# Altium PCB ANT-F-2.4G-FR4.PcbDoc (part 2 of 2)
Units mil, origin at the board's own origin, x right, y up, seen from the top; angles counter-clockwise.
Board outline 8878.9 x 2863.35 mil, 2 copper layers (Top Layer, Bottom Layer); 99 components, 48 nets, 825 pads, 1430 vias.
Unrouted connection lines stored in the file: 96.
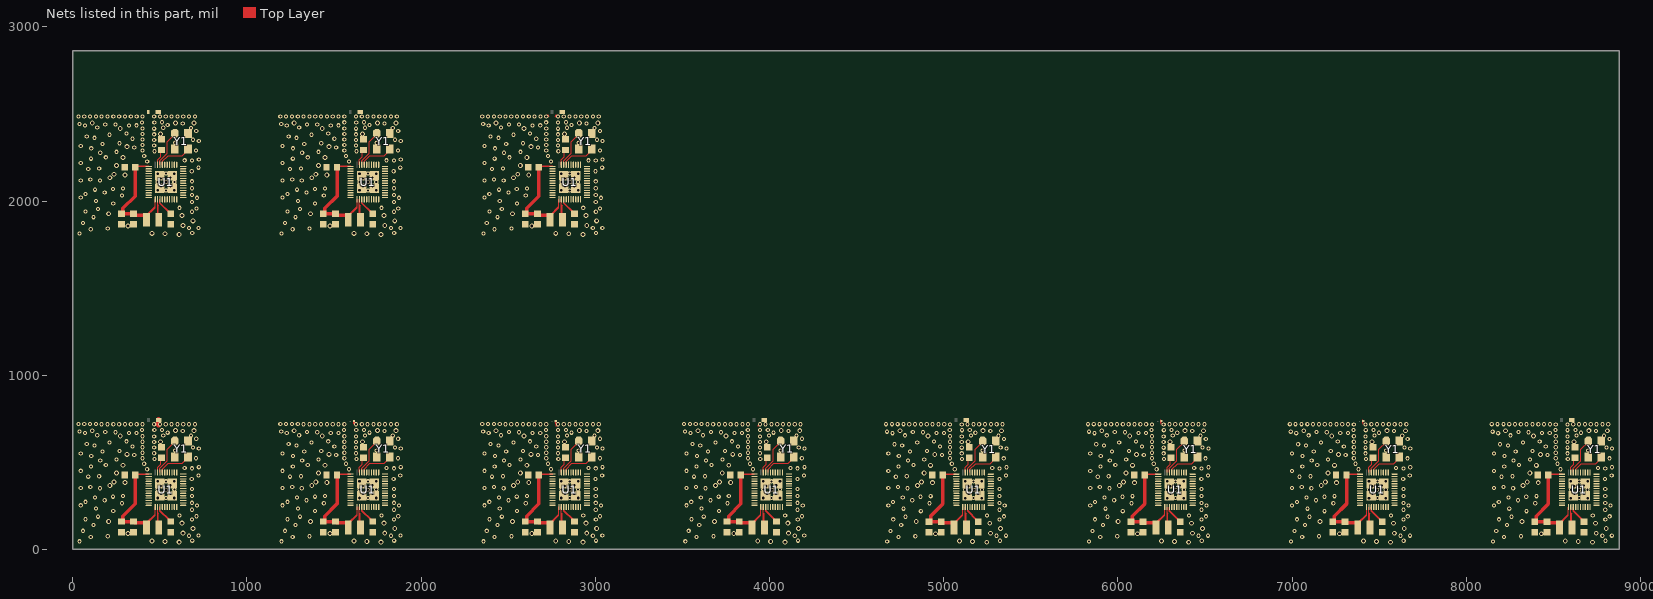
[diagram p2: the nets of this part, all layers, seen from the top]

## Via types
v1: diameter 24, hole 12, Top Layer to Bottom Layer, tented both sides, 1221 vias
v2: diameter 28, hole 16, Top Layer to Bottom Layer, tented both sides, 209 vias

## Nets (pads, with @x,y where several pads share a name; then routed paths per layer and width w, separated by ;. In a path a pad name is that pad's centre, name@x,y a point inside that pad or via, vN(x,y) a via of type N, cw(c..) or ccw(c..) an arc to the next point about the centre after c; other vN are vias at no path point) (continued)
GND: ?.0 C1.2 C2.2 C3.1 C4.1 C5.1 E1.0 E1.1@433.85,2510.87 U1.0 Y1.2 Y1.4 | length 167
  Top Layer w6: E1.0@492.39,744.57 E1.0@493.45,744.57 ; 6246.94,746.18 6246.94,727.57 cw(c6240.18,720.81) 6249.74,720.81 6249.74,719.57 ccw(c6251.57,719.57) 6250.27,718.27 ; 7406.01,746.18 7406.01,727.57 cw(c7399.25,720.81) 7408.81,720.81 7408.81,719.57 ccw(c7410.65,719.57) 7409.35,718.27
  Top Layer w8: 2727.79,2494.91 ccw(c2736.37,2494.91) 2730.29,2488.85 ; 2730.3,2488.84 2734.24,2484.91 ; 2769.24,2484.91 2772.82,2488.49 ; 2771.59,729.81 ccw(c2802.29,740.98) v1@2779.19,717.88 ; 2772.82,2488.5 ccw(c2766.4,2494.91) 2775.47,2494.91 ; E1.0@2773.12,735.98 E1.0@2773.12,738.51 ; v1@2774.66,722.6 cw(c2750.54,714.48) 2775.99,714.48 2775.99,708.57 ; v1@2777.9,725.69 v1@2778.07,725.52 ; 3935.07,708.57 v1@3935.07,714.48 ; ?.0@6249.74,738.18 cw(c6248.44,736.88) ?.0@6250.27,736.88 ; E1.0@7408.81,738.18 cw(c7407.52,736.88) E1.0@7409.35,736.88
  Top Layer w11: 1613.91,728.21 ccw(c1637.52,736.81) v1@1619.75,719.04 ; E1.0@1614.19,736.81 E1.0@1614.19,738.51 ; E1.0@2773.27,736.81 E1.0@2773.27,738.51
  Top Layer w30: v1@492.39,715.08 E1.0@492.39,744.57
  other v1: 39.65,47 1198.73,47 2357.8,47 3516.88,47 4675.95,46.67 5835.03,46.67 6994.1,46.67 8153.18,46.67 686.51,50.79 1845.58,50.79 3004.66,50.79 4163.73,50.79 5322.81,50.46 6481.88,50.46 7640.96,50.46 8800.03,50.46 103.81,72.5 1262.88,72.5 2421.96,72.5 3581.03,72.5 4740.11,72.17 5899.18,72.17 7058.26,72.17 8217.33,72.17 4837.5,76.04 5996.57,76.04 7155.65,76.04 8314.72,76.04 201.2,76.37 1360.27,76.37 2519.35,76.37 3678.42,76.37 5304.16,78.92 6463.24,78.92 7622.31,78.92 8781.39,78.92 667.86,79.25 722.44,79.84 1826.93,79.25 1881.52,79.84 2986.01,79.25 3040.59,79.84 4145.08,79.25 4199.67,79.84 5358.74,79.51 6517.82,79.51 7676.89,79.51 8835.97,79.51 4695.28,106.96 5854.35,106.96 7013.43,106.96 8172.5,106.96 58.98,107.29 1218.05,107.29 2377.13,107.29 3536.2,107.29 119.9,141.58 1278.97,141.58 2438.05,141.58 3597.12,141.58 4756.2,141.25 5915.28,141.25 7074.35,141.25 8233.43,141.25 685.14,172.86 1844.21,172.86 3003.29,172.86 4162.36,172.86 5321.44,172.53 6480.51,172.53 7639.59,172.53 8798.66,172.53 74.44,173.64 1233.51,173.64 2392.59,173.64 3551.66,173.64 4710.74,173.31 5869.81,173.31 7028.89,173.31 8187.96,173.31 145.55,188.59 1304.62,188.59 2463.7,188.59 3622.77,188.59 4781.85,188.26 5940.92,188.26 7100,188.26 8259.07,188.26 709.95,190.84 1869.03,190.84 3028.1,190.84 4187.18,190.84 5346.25,190.51 6505.33,190.51 7664.4,190.51 8823.48,190.51 5249.4,194.99 6408.48,194.99 7567.55,194.99 8726.63,194.99 613.1,195.32 1772.18,195.32 2931.25,195.32 4090.33,195.32 4868.94,219.94 6028.01,219.94 7187.09,219.94 8346.16,219.94 232.64,220.27 1391.71,220.27 2550.79,220.27 3709.86,220.27 684.68,228.42 1843.76,228.42 3002.84,228.42 4161.91,228.42 5320.99,228.09 6480.06,228.09 7639.14,228.09 8798.21,228.09 133.52,234.65 1292.59,234.65 2451.67,234.65 3610.74,234.65 4769.82,234.32 5928.89,234.32 7087.97,234.32 8247.04,234.32 714.14,252.68 1873.22,252.68 3032.29,252.68 4191.37,252.68 5350.44,252.35 6509.52,252.35 7668.6,252.35 8827.67,252.35 46.21,253.66 1205.29,253.66 2364.36,253.66 3523.44,253.66 4682.51,253.33 5841.59,253.33 7000.66,253.33 8159.74,253.33 282.57,265.67 1441.65,265.67 2600.72,265.67 3759.8,265.67 4918.87,265.34 6077.95,265.34 7237.02,265.34 8396.1,265.34 684.68,268.05 1843.76,268.05 3002.84,268.05 4161.91,268.05 5320.99,267.72 6480.06,267.72 7639.14,267.72 8798.21,267.72 73.71,273.8 1232.78,273.8 2391.86,273.8 3550.93,273.8 4710.01,273.47 5869.08,273.47 7028.16,273.47 8187.23,273.47 183.67,283.03 1342.75,283.03 2501.82,283.03 3660.9,283.03 4819.97,282.7 5979.05,282.7 7138.12,282.7 8297.2,282.7 535.46,295.41 1694.53,295.41 2853.61,295.41 4012.68,295.41 5171.76,295.08 6330.83,295.08 7489.91,295.08 8648.98,295.08 4764.99,298.98 5924.06,298.98 7083.14,298.98 8242.22,298.98 128.69,299.31 1287.76,299.31 2446.84,299.31 3605.91,299.31 4867.65,302.84 6026.73,302.84 7185.8,302.84 8344.88,302.84 231.35,303.17 1390.42,303.17 2549.5,303.17 3708.58,303.17 289.38,306.53 1448.46,306.53 2607.53,306.53 3766.61,306.53 4925.68,306.2 6084.76,306.2 7243.83,306.2 8402.91,306.2 684.68,307.69 1843.76,307.69 3002.84,307.69 4161.91,307.69 5320.99,307.36 6480.06,307.36 7639.14,307.36 8798.21,307.36 507.8,318.04 1666.87,318.04 2825.95,318.04 3985.02,318.04 5144.1,317.71 6303.17,317.71 7462.25,317.71 8621.32,317.71 561.47,318.98 1720.54,318.98 2879.62,318.98 4038.69,318.98 5197.77,318.64 6356.84,318.64 7515.92,318.64 8674.99,318.64 487.46,343.41 583.46,343.41 1646.53,343.41 1742.53,343.41 2805.61,343.41 2901.61,343.41 3964.68,343.41 4060.68,343.41 5123.76,343.08 5219.76,343.08 6282.83,343.08 6378.83,343.08 7441.91,343.08 7537.91,343.08 8600.98,343.08 8696.98,343.08 5320.99,346.99 6480.06,346.99 7639.14,346.99 8798.21,346.99 684.68,347.32 1843.76,347.32 3002.84,347.32 4161.91,347.32 156.18,351.87 1315.26,351.87 2474.33,351.87 3633.41,351.87 4792.48,351.54 5951.56,351.54 7110.63,351.54 8269.71,351.54 46.21,352.69 1205.29,352.69 2364.36,352.69 3523.44,352.69 4682.51,352.36 5841.59,352.36 7000.66,352.36 8159.74,352.36 101.2,358.69 1260.27,358.69 2419.35,358.69 3578.42,358.69 4737.5,358.36 5896.57,358.36 7055.65,358.36 8214.72,358.36 506.8,363.47 1665.88,363.47 2824.95,363.47 3984.03,363.47 5143.1,363.14 6302.18,363.14 7461.25,363.14 8620.33,363.14 561.99,368.8 1721.07,368.8 2880.14,368.8 4039.22,368.8 5198.29,368.47 6357.37,368.47 7516.44,368.47 8675.52,368.47 535.46,391.41 1694.53,391.41 2853.61,391.41 4012.68,391.41 5171.76,391.08 6330.83,391.08 7489.91,391.08 8648.98,391.08 5320.06,405 6479.14,405 7638.22,405 8797.29,405 683.76,405.34 1842.84,405.34 3001.91,405.34 4160.99,405.34 4725.43,417.74 5884.5,417.74 7043.58,417.74 8202.65,417.74 89.13,418.07 1248.2,418.07 2407.28,418.07 3566.35,418.07 152.11,420.75 1311.18,420.75 2470.26,420.75 3629.33,420.75 4788.41,420.42 5947.48,420.42 7106.56,420.42 8265.63,420.42 721.6,425.76 1880.68,425.76 3039.75,425.76 4198.83,425.76 5357.9,425.42 6516.98,425.42 7676.05,425.42 8835.13,425.42 46.21,451.72 1205.29,451.72 2364.36,451.72 3523.44,451.72 4682.51,451.39 5841.59,451.39 7000.66,451.39 8159.74,451.39 427.67,460.93 1586.74,460.93 2745.82,460.93 3904.89,460.93 5063.97,460.6 6223.04,460.6 7382.12,460.6 8541.19,460.6 5320.99,465.9 6480.06,465.9 7639.14,465.9 8798.21,465.9 684.68,466.23 1843.76,466.23 3002.84,466.23 4161.91,466.23 642.85,468.06 1801.93,468.06 2961,468.06 4120.08,468.06 5279.16,467.73 6438.23,467.73 7597.31,467.73 8756.38,467.73 724.21,472.61 1883.28,472.61 3042.36,472.61 4201.43,472.61 5360.51,472.28 6519.58,472.28 7678.66,472.28 8837.73,472.28 104.59,477.45 1263.66,477.45 2422.74,477.45 3581.81,477.45 4740.89,477.12 5899.96,477.12 7059.04,477.12 8218.11,477.12 4826.57,484.76 5985.64,484.76 7144.72,484.76 8303.79,484.76 190.26,485.09 1349.34,485.09 2508.42,485.09 3667.49,485.09 410.58,492.5 1569.66,492.5 2728.73,492.5 3887.81,492.5 5046.88,492.17 6205.96,492.17 7365.03,492.17 8524.11,492.17 158.49,511.57 1317.56,511.57 2476.64,511.57 3635.71,511.57 4794.79,511.24 5953.86,511.24 7112.94,511.24 8272.01,511.24 252.43,516.74 1411.51,516.74 2570.58,516.74 3729.66,516.74 4888.73,516.41 6047.81,516.41 7206.88,516.41 8365.96,516.41 5106.11,519.95 6265.18,519.95 7424.26,519.95 8583.33,519.95 469.81,520.29 1628.88,520.29 2787.96,520.29 3947.03,520.29 400.26,524.06 708.64,523.8 1559.33,524.06 1867.71,523.8 2718.41,524.06 3026.79,523.8 3877.48,524.06 4185.86,523.8 5036.56,523.73 5344.94,523.46 6195.63,523.73 6504.01,523.46 7354.71,523.73 7663.09,523.46 8513.78,523.73 8822.16,523.46 106.34,536.83 1265.42,536.83 2424.49,536.83 3583.57,536.83 4742.64,536.5 5901.72,536.5 7060.8,536.5 8219.87,536.5 4989.99,541.91 6149.06,541.91 7308.14,541.91 8467.21,541.91 353.69,542.25 1512.76,542.25 2671.84,542.25 3830.91,542.25 46.21,550.75 1205.29,550.75 2364.36,550.75 3523.44,550.75 4682.51,550.42 5841.59,550.42 7000.66,550.42 8159.74,550.42 467.81,552.61 1626.88,552.61 2785.96,552.61 3945.03,552.61 5104.11,552.27 6263.18,552.27 7422.26,552.27 8581.33,552.27 400.26,555.63 1559.33,555.63 2718.41,555.63 3877.48,555.63 5036.56,555.29 6195.63,555.29 7354.71,555.29 8513.78,555.29 4806.8,562.01 5965.87,562.01 7124.95,562.01 8284.02,562.01 170.5,562.34 1329.57,562.34 2488.65,562.34 3647.72,562.34 4904.19,565.88 6063.26,565.88 7222.34,565.88 8381.42,565.88 267.89,566.21 1426.96,566.21 2586.04,566.21 3745.11,566.21 5222.99,568.01 6382.06,568.01 7541.14,568.01 8700.21,568.01 586.69,568.34 1745.76,568.34 2904.84,568.34 4063.91,568.34 5360.51,579.02 6519.58,579.02 7678.66,579.02 8837.73,579.02 724.21,579.35 1883.28,579.35 3042.36,579.35 4201.43,579.35 467.81,584.92 1626.88,584.92 2785.96,584.92 3945.03,584.92 5104.11,584.59 6263.18,584.59 7422.26,584.59 8581.33,584.59 691.13,585.95 1850.21,585.95 3009.28,585.95 4168.36,585.95 5327.43,585.62 6486.51,585.62 7645.58,585.62 8804.66,585.62 5036.56,586.86 6195.63,586.86 7354.71,586.86 8513.78,586.86 400.26,587.19 1559.33,587.19 2718.41,587.19 3877.48,587.19 342.86,591.71 1501.94,591.71 2661.02,591.71 3820.09,591.71 4979.17,591.38 6138.24,591.38 7297.32,591.38 8456.39,591.38 4761.97,596.79 5921.04,596.79 7080.12,596.79 8239.19,596.79 125.67,597.12 1284.74,597.12 2443.82,597.12 3602.89,597.12 80.84,604.85 1239.91,604.85 2398.99,604.85 3558.06,604.85 4717.14,604.52 5876.21,604.52 7035.29,604.52 8194.36,604.52 212.24,614.9 1371.31,614.9 2530.39,614.9 3689.46,614.9 4848.54,614.57 6007.61,614.57 7166.69,614.57 8325.76,614.57 5104.11,616.91 6263.18,616.91 7422.26,616.91 8581.33,616.91 467.81,617.24 1626.88,617.24 2785.96,617.24 3945.03,617.24 400.26,618.75 1559.33,618.75 2718.41,618.75 3877.48,618.75 5036.56,618.42 6195.63,618.42 7354.71,618.42 8513.78,618.42 4944.38,620.75 6103.46,620.75 7262.53,620.75 8421.61,620.75 308.08,621.09 1467.16,621.09 2626.23,621.09 3785.31,621.09 709.59,635.64 1868.66,635.64 3027.74,635.64 4186.81,635.64 5345.89,635.31 6504.96,635.31 7664.04,635.31 8823.12,635.31 467.81,649.56 1626.88,649.56 2785.96,649.56 3945.03,649.56 5036.56,649.99 5104.11,649.23 6195.63,649.99 6263.18,649.23 7354.71,649.99 7422.26,649.23 8513.78,649.99 8581.33,649.23 400.26,650.32 1559.33,650.32 2718.41,650.32 3877.48,650.32 678.32,653.44 1837.4,653.44 2996.47,653.44 4155.55,653.44 5314.62,653.1 6473.7,653.1 7632.78,653.1 8791.85,653.1 519.87,654.77 1678.95,654.77 2838.02,654.77 3997.1,654.77 5156.17,654.44 6315.25,654.44 7474.32,654.44 8633.4,654.44 141.13,655.87 1300.2,655.87 2459.28,655.87 3618.35,655.87 4777.43,655.54 5936.5,655.54 7095.58,655.54 8254.65,655.54 4706.32,667.9 4958.71,668.01 5865.39,667.9 6117.79,668.01 7024.47,667.9 7276.86,668.01 8183.54,667.9 8435.94,668.01 70.02,668.23 322.41,668.34 366.05,669.01 1229.09,668.23 1481.49,668.34 1525.13,669.01 2388.17,668.23 2640.56,668.34 2684.2,669.01 3547.24,668.23 3799.64,668.34 3843.28,669.01 5002.35,668.68 6161.43,668.68 7320.5,668.68 8479.58,668.68 545.45,670.63 1704.53,670.63 2863.6,670.63 4022.68,670.63 5181.75,670.3 6340.83,670.3 7499.9,670.3 8658.98,670.3 4881.21,672.94 6040.28,672.94 7199.36,672.94 8358.43,672.94 244.91,673.28 1403.98,673.28 2563.06,673.28 3722.13,673.28 186.73,674.42 1345.8,674.42 2504.88,674.42 3663.96,674.42 4823.03,674.09 5982.11,674.09 7141.18,674.09 8300.26,674.09 38.32,676.74 1197.4,676.74 2356.48,676.74 3515.55,676.74 4674.63,676.41 5833.7,676.41 6992.78,676.41 8151.85,676.41 5267.98,679.92 6427.05,679.92 7586.13,679.92 8745.2,679.92 631.67,680.25 1790.75,680.25 2949.82,680.25 4108.9,680.25 5105,685 6264.08,685 7423.15,685 8582.23,685 398.51,686 468.7,685.33 1557.59,686 1627.78,685.33 2716.66,686 2786.85,685.33 3875.74,686 3945.93,685.33 5034.81,685.67 6193.89,685.67 7352.96,685.67 8512.04,685.67 513.37,686.67 1672.45,686.67 2831.52,686.67 3990.6,686.67 5149.67,686.34 6308.75,686.34 7467.82,686.34 8626.9,686.34 400.26,718.88 467.81,718.88 1559.33,718.88 1626.88,718.88 2718.41,718.88 2785.96,718.88 3877.48,718.88 3945.03,718.88 4802.61,719.01 4836.11,719.01 4869.61,719.01 4903.12,719.01 4936.62,719.01 4970.12,719.01 5003.62,719.01 5036.56,718.55 5104.11,718.55 5137.04,719.01 5170.54,719.01 5204.04,719.01 5237.55,719.01 5271.05,719.01 5304.55,719.01 5338.05,719.01 5961.69,719.01 5995.19,719.01 6028.69,719.01 6062.19,719.01 6095.69,719.01 6129.2,719.01 6162.7,719.01 6195.63,718.55 6263.18,718.55 6296.12,719.01 6329.62,719.01 6363.12,719.01 6396.62,719.01 6430.12,719.01 6463.63,719.01 6497.13,719.01 7120.76,719.01 7154.26,719.01 7187.76,719.01 7221.27,719.01 7254.77,719.01 7288.27,719.01 7321.77,719.01 7354.71,718.55 7422.26,718.55 7455.19,719.01 7488.69,719.01 7522.19,719.01 7555.7,719.01 7589.2,719.01 7622.7,719.01 7656.2,719.01 8279.84,719.01 8313.34,719.01 8346.84,719.01 8380.34,719.01 8413.84,719.01 8447.35,719.01 8480.85,719.01 8513.78,718.55 8581.33,718.55 8614.27,719.01 8647.77,719.01 8681.27,719.01 8714.77,719.01 8748.27,719.01 8781.78,719.01 8815.28,719.01 32.87,719.8 66.37,719.8 99.87,719.8 133.38,719.8 166.31,719.34 199.81,719.34 233.31,719.34 266.82,719.34 300.32,719.34 333.82,719.34 367.32,719.34 500.74,719.34 534.24,719.34 567.74,719.34 601.25,719.34 634.75,719.34 668.25,719.34 701.75,719.34 1191.94,719.8 1225.45,719.8 1258.95,719.8 1292.45,719.8 1325.38,719.34 1358.89,719.34 1392.39,719.34 1425.89,719.34 1459.39,719.34 1492.9,719.34 1526.4,719.34 1659.81,719.34 1693.32,719.34 1726.82,719.34 1760.32,719.34 1793.82,719.34 1827.33,719.34 1860.83,719.34 2351.02,719.8 2384.52,719.8 2418.02,719.8 2451.53,719.8 2484.46,719.34 2517.96,719.34 2551.46,719.34 2584.97,719.34 2618.47,719.34 2651.97,719.34 2685.47,719.34 2818.89,719.34 2852.39,719.34 2885.89,719.34 2919.4,719.34 2952.9,719.34 2986.4,719.34 3019.9,719.34 3510.09,719.8 3543.6,719.8 3577.1,719.8 3610.6,719.8 3643.53,719.34 3677.04,719.34 3710.54,719.34 3744.04,719.34 3777.54,719.34 3811.05,719.34 3844.55,719.34 3977.96,719.34 4011.47,719.34 4044.97,719.34 4078.47,719.34 4111.97,719.34 4145.48,719.34 4178.98,719.34 4669.17,719.47 4702.67,719.47 4736.17,719.47 4769.68,719.47 5828.24,719.47 5861.75,719.47 5895.25,719.47 5928.75,719.47 6987.32,719.47 7020.82,719.47 7054.32,719.47 7087.83,719.47 8146.4,719.47 8179.9,719.47 8213.4,719.47 8246.9,719.47 39.65,1813.3 1198.73,1813.3 2357.8,1813.3 686.51,1817.09 1845.58,1817.09 3004.66,1817.09 103.81,1838.81 1262.88,1838.81 2421.96,1838.81 201.2,1842.67 1360.27,1842.67 2519.35,1842.67 667.86,1845.56 1826.93,1845.56 2986.01,1845.56 722.44,1846.14 1881.52,1846.14 3040.59,1846.14 58.98,1873.59 1218.05,1873.59 2377.13,1873.59 119.9,1907.89 1278.97,1907.89 2438.05,1907.89 74.44,1939.94 685.14,1939.16 1233.51,1939.94 1844.21,1939.16 2392.59,1939.94 3003.29,1939.16 145.55,1954.89 1304.62,1954.89 2463.7,1954.89 709.95,1957.14 1869.03,1957.14 3028.1,1957.14 613.1,1961.62 1772.18,1961.62 2931.25,1961.62 232.64,1986.58 1391.71,1986.58 2550.79,1986.58 684.68,1994.72 1843.76,1994.72 3002.84,1994.72 133.52,2000.95 1292.59,2000.95 2451.67,2000.95 714.14,2018.98 1873.22,2018.98 3032.29,2018.98 46.21,2019.97 1205.29,2019.97 2364.36,2019.97 282.57,2031.97 1441.65,2031.97 2600.72,2031.97 684.68,2034.36 1843.76,2034.36 3002.84,2034.36 73.71,2040.11 1232.78,2040.11 2391.86,2040.11 183.67,2049.34 1342.75,2049.34 2501.82,2049.34 535.46,2061.71 1694.53,2061.71 2853.61,2061.71 128.69,2065.61 1287.76,2065.61 2446.84,2065.61 231.35,2069.48 1390.42,2069.48 2549.5,2069.48 289.38,2072.83 1448.46,2072.83 2607.53,2072.83 684.68,2073.99 1843.76,2073.99 3002.84,2073.99 507.8,2084.34 1666.87,2084.34 2825.95,2084.34 561.47,2085.28 1720.54,2085.28 2879.62,2085.28 487.46,2109.71 583.46,2109.71 1646.53,2109.71 1742.53,2109.71 2805.61,2109.71 2901.61,2109.71 684.68,2113.63 1843.76,2113.63 3002.84,2113.63 46.21,2119 156.18,2118.17 1205.29,2119 1315.26,2118.17 2364.36,2119 2474.33,2118.17 101.2,2124.99 1260.27,2124.99 2419.35,2124.99 506.8,2129.77 1665.88,2129.77 2824.95,2129.77 561.99,2135.11 1721.07,2135.11 2880.14,2135.11 535.46,2157.71 1694.53,2157.71 2853.61,2157.71 683.76,2171.64 1842.84,2171.64 3001.91,2171.64 89.13,2184.38 1248.2,2184.38 2407.28,2184.38 152.11,2187.06 1311.18,2187.06 2470.26,2187.06 721.6,2192.06 1880.68,2192.06 3039.75,2192.06 46.21,2218.02 1205.29,2218.02 2364.36,2218.02 427.67,2227.24 1586.74,2227.24 2745.82,2227.24 684.68,2232.53 1843.76,2232.53 3002.84,2232.53 642.85,2234.36 1801.93,2234.36 2961,2234.36 724.21,2238.92 1883.28,2238.92 3042.36,2238.92 104.59,2243.76 1263.66,2243.76 2422.74,2243.76 190.26,2251.39 1349.34,2251.39 2508.42,2251.39 410.58,2258.8 1569.66,2258.8 2728.73,2258.8 158.49,2277.87 1317.56,2277.87 2476.64,2277.87 252.43,2283.04 1411.51,2283.04 2570.58,2283.04 469.81,2286.59 1628.88,2286.59 2787.96,2286.59 400.26,2290.37 708.64,2290.1 1559.33,2290.37 1867.71,2290.1 2718.41,2290.37 3026.79,2290.1 106.34,2303.14 1265.42,2303.14 2424.49,2303.14 353.69,2308.55 1512.76,2308.55 2671.84,2308.55 46.21,2317.05 1205.29,2317.05 2364.36,2317.05 467.81,2318.91 1626.88,2318.91 2785.96,2318.91 400.26,2321.93 1559.33,2321.93 2718.41,2321.93 170.5,2328.65 1329.57,2328.65 2488.65,2328.65 267.89,2332.51 1426.96,2332.51 2586.04,2332.51 586.69,2334.65 1745.76,2334.65 2904.84,2334.65 724.21,2345.65 1883.28,2345.65 3042.36,2345.65 467.81,2351.23 1626.88,2351.23 2785.96,2351.23 691.13,2352.25 1850.21,2352.25 3009.28,2352.25 400.26,2353.49 1559.33,2353.49 2718.41,2353.49 342.86,2358.02 1501.94,2358.02 2661.02,2358.02 125.67,2363.43 1284.74,2363.43 2443.82,2363.43 80.84,2371.16 1239.91,2371.16 2398.99,2371.16 212.24,2381.21 1371.31,2381.21 2530.39,2381.21 467.81,2383.55 1626.88,2383.55 2785.96,2383.55 400.26,2385.06 1559.33,2385.06 2718.41,2385.06 308.08,2387.39 1467.16,2387.39 2626.23,2387.39 709.59,2401.95 1868.66,2401.95 3027.74,2401.95 467.81,2415.87 1626.88,2415.87 2785.96,2415.87 400.26,2416.62 1559.33,2416.62 2718.41,2416.62 678.32,2419.74 1837.4,2419.74 2996.47,2419.74 519.87,2421.07 1678.95,2421.07 2838.02,2421.07 141.13,2422.17 1300.2,2422.17 2459.28,2422.17 70.02,2434.54 322.41,2434.64 1229.09,2434.54 1481.49,2434.64 2388.17,2434.54 2640.56,2434.64 366.05,2435.31 1525.13,2435.31 2684.2,2435.31 545.45,2436.93 1704.53,2436.93 2863.6,2436.93 244.91,2439.58 1403.98,2439.58 2563.06,2439.58 186.73,2440.72 1345.8,2440.72 2504.88,2440.72 38.32,2443.04 1197.4,2443.04 2356.48,2443.04 631.67,2446.56 1790.75,2446.56 2949.82,2446.56 468.7,2451.63 1627.78,2451.63 2786.85,2451.63 398.51,2452.3 513.37,2452.97 1559.27,2452.42 1672.45,2452.97 2718.35,2452.42 2831.52,2452.97 166.31,2485.65 199.81,2485.65 233.31,2485.65 266.82,2485.65 300.32,2485.65 333.82,2485.65 367.32,2485.65 400.26,2485.19 467.81,2485.19 500.74,2485.65 534.24,2485.65 567.74,2485.65 601.25,2485.65 634.75,2485.65 668.25,2485.65 701.75,2485.65 1325.38,2485.65 1358.89,2485.65 1392.39,2485.65 1425.89,2485.65 1459.39,2485.65 1492.9,2485.65 1526.4,2485.65 1559.33,2485.19 1626.88,2485.19 1659.81,2485.65 1693.32,2485.65 1726.82,2485.65 1760.32,2485.65 1793.82,2485.65 1827.33,2485.65 1860.83,2485.65 2484.46,2485.65 2517.96,2485.65 2551.46,2485.65 2584.97,2485.65 2618.47,2485.65 2651.97,2485.65 2685.47,2485.65 2718.41,2485.19 2785.96,2485.19 2818.89,2485.65 2852.39,2485.65 2885.89,2485.65 2919.4,2485.65 2952.9,2485.65 2986.4,2485.65 3019.9,2485.65 32.87,2486.11 66.37,2486.11 99.87,2486.11 133.38,2486.11 1191.94,2486.11 1225.45,2486.11 1258.95,2486.11 1292.45,2486.11 2351.02,2486.11 2384.52,2486.11 2418.02,2486.11 2451.53,2486.11
  other v2: 5247.54,41.92 6406.62,41.92 7565.69,41.92 8724.77,41.92 611.24,42.25 1770.32,42.25 2929.39,42.25 4088.47,42.25 5166,45.83 6325.07,45.83 7484.15,45.83 8643.22,45.83 529.7,46.16 1688.77,46.16 2847.85,46.16 4006.92,46.16 455.33,48.77 1614.41,48.77 2773.48,48.77 3932.56,48.77 5091.63,48.44 6250.71,48.44 7409.78,48.44 8568.86,48.44 4953.99,90.84 6113.06,90.84 7272.14,90.84 8431.21,90.84 317.69,91.17 1476.76,91.17 2635.84,91.17 3794.91,91.17 632.77,93.78 1791.84,93.78 2950.92,93.78 4109.99,93.78 5269.07,93.45 6428.14,93.45 7587.22,93.45 8746.3,93.45 690.05,120.66 1849.12,120.66 3008.2,120.66 4167.27,120.66 5326.35,120.33 6485.42,120.33 7644.5,120.33 8803.57,120.33 5264.5,150.86 6423.58,150.86 7582.65,150.86 8741.73,150.86 628.2,151.19 1787.28,151.19 2946.35,151.19 4105.43,151.19 206.6,161.44 1365.68,161.44 2524.75,161.44 3683.83,161.44 4842.9,161.11 6001.98,161.11 7161.05,161.11 8320.13,161.11 4849.46,367.77 6008.54,367.77 7167.61,367.77 8326.69,367.77 213.16,368.1 1372.24,368.1 2531.31,368.1 3690.39,368.1 4936.37,383.75 6095.45,383.75 7254.52,383.75 8413.6,383.75 300.07,384.08 1459.15,384.08 2618.22,384.08 3777.3,384.08 4873.06,387.91 6032.13,387.91 7191.21,387.91 8350.28,387.91 236.76,388.24 1395.83,388.24 2554.91,388.24 3713.98,388.24 251.8,438.87 1410.87,438.87 2569.95,438.87 3729.02,438.87 4888.1,438.54 6047.18,438.54 7206.25,438.54 8365.33,438.54 289.02,483.52 1448.1,483.52 2607.17,483.52 3766.25,483.52 4925.32,483.19 6084.4,483.19 7243.47,483.19 8402.55,483.19 312.32,546.43 1471.4,546.43 2630.47,546.43 3789.55,546.43 4948.62,546.1 6107.7,546.1 7266.77,546.1 8425.85,546.1 504.56,618.49 1663.63,618.49 2822.71,618.49 3981.78,618.49 5140.86,618.16 6299.93,618.16 7459.01,618.16 8618.08,618.16 4909.6,650.94 6068.67,650.94 7227.75,650.94 8386.82,650.94 273.29,651.27 1432.37,651.27 2591.44,651.27 3750.52,651.27 4748.83,681.81 5332.94,681.93 5907.91,681.81 6492.02,681.93 7066.98,681.81 7651.09,681.93 8226.06,681.81 8810.17,681.93 112.53,682.14 590.37,682.66 696.64,682.26 1271.61,682.14 1749.44,682.66 1855.72,682.26 2430.68,682.14 2908.52,682.66 3014.79,682.26 3589.76,682.14 4067.59,682.66 4173.87,682.26 5226.67,682.33 6385.74,682.33 7544.82,682.33 8703.9,682.33 611.24,1808.55 1770.32,1808.55 2929.39,1808.55 529.7,1812.47 1688.77,1812.47 2847.85,1812.47 455.33,1815.08 1614.41,1815.08 2773.48,1815.08 317.69,1857.48 1476.76,1857.48 2635.84,1857.48 632.77,1860.09 1791.84,1860.09 2950.92,1860.09 690.05,1886.96 1849.12,1886.96 3008.2,1886.96 628.2,1917.49 1787.28,1917.49 2946.35,1917.49 206.6,1927.74 1365.68,1927.74 2524.75,1927.74 213.16,2134.41 1372.24,2134.41 2531.31,2134.41 300.07,2150.38 1459.15,2150.38 2618.22,2150.38 236.76,2154.55 1395.83,2154.55 2554.91,2154.55 251.8,2205.18 1410.87,2205.18 2569.95,2205.18 289.02,2249.83 1448.1,2249.83 2607.17,2249.83 312.32,2312.73 1471.4,2312.73 2630.47,2312.73 504.56,2384.8 1663.63,2384.8 2822.71,2384.8 273.29,2417.58 1432.37,2417.58 2591.44,2417.58 112.53,2448.45 590.37,2448.96 696.64,2448.56 1271.61,2448.45 1749.44,2448.96 1855.72,2448.56 2430.68,2448.45 2908.52,2448.96 3014.79,2448.56
PA0: U1.39
PA1: U1.40
PA2: U1.41
PA3: U1.42
PA4: U1.36
PA5: U1.37
PA6: U1.38
PA7: U1.4
PA8: U1.5
PA9: U1.6
PA10: U1.48
PA11: U1.47
PA12: U1.46
PA13: U1.45
PA14: U1.44
PA15: U1.43
PB0: U1.24
PB1: U1.23
PB2: U1.22
PB3: U1.21
PB4: U1.20
PB5: U1.19
PB6: U1.18
PB7: U1.17
PB8: U1.8
PB9: U1.7
PB10: U1.16
PB11: U1.15
PB12: U1.14
PB13: U1.13
PB14: U1.12
PB15: U1.11
PB16: U1.10
PB17: U1.9
PB18: U1.30
PB19: U1.29
PB20: U1.28
PB21: U1.27
PB22: U1.26
PB23: U1.25
VCC: C3.2 U1.3 | length 2294.1
  Top Layer w7: U1.3@501.01,244.25 501.01,220.21 545.86,175.35 548.04,175.35 C3.2@562.85,160.54 ; U1.3@501.01,2010.55 501.01,1986.51 545.86,1941.65 548.04,1941.65 C3.2@562.85,1926.85 ; U1.3@501.01,244.25 501.03,225.39 C3.2@556.96,169.46 ; U1.3@501.01,2010.55 501.03,1991.7 C3.2@556.96,1935.76 ; U1.3@1660.1,244.23 1660.1,225.39 C3.2@1716.03,169.46 ; U1.3@1660.08,244.25 1660.08,220.21 1704.94,175.35 1707.12,175.35 C3.2@1721.92,160.54 ; U1.3@1660.1,2010.54 1660.1,1991.7 C3.2@1716.03,1935.76 ; U1.3@1660.08,2010.55 1660.08,1986.51 1704.94,1941.65 1707.12,1941.65 C3.2@1721.92,1926.85 ; U1.3@2819.16,244.25 2819.16,220.21 2864.02,175.35 2866.19,175.35 C3.2@2881,160.54 ; U1.3@2819.16,2010.55 2819.16,1986.51 2864.02,1941.65 2866.19,1941.65 C3.2@2881,1926.85 ; U1.3@2819.16,244.25 2819.18,225.39 C3.2@2875.11,169.46 ; U1.3@2819.16,2010.55 2819.18,1991.7 C3.2@2875.11,1935.76 ; U1.3@3978.24,244.25 3978.25,225.39 C3.2@4034.18,169.46 ; U1.3@3978.24,244.25 3978.24,220.21 4023.09,175.35 4025.27,175.35 C3.2@4040.07,160.54 ; U1.3@5137.31,243.92 5137.31,219.87 5182.17,175.02 5184.34,175.02 C3.2@5199.15,160.21 ; U1.3@5137.31,243.92 5137.33,225.06 C3.2@5193.26,169.13 ; C3.2@6352.33,169.13 6296.4,225.06 6296.4,243.9 6296.39,219.87 6341.24,175.02 6343.42,175.02 C3.2@6358.22,160.21 ; U1.3@7455.46,243.92 7455.46,219.87 7500.32,175.02 7502.49,175.02 C3.2@7517.3,160.21 ; U1.3@7455.46,243.92 7455.48,225.06 C3.2@7511.41,169.13 ; C3.2@8670.48,169.13 8614.55,225.06 U1.3@8614.54,243.92 8614.54,219.87 8659.39,175.02 8661.57,175.02 C3.2@8676.37,160.21
VDCIA: C2.1 C4.2 C5.2 L1.2 U1.1 U1.35 | length 8124.8
  Top Layer w7: L1.2@422.77,146.25 473.45,196.93 473.45,203.84 ; L1.2@422.77,1912.55 473.45,1963.23 473.45,1970.14 ; L1.2@423.48,153.86 473.45,203.84 ; L1.2@423.48,1920.17 473.45,1970.14 ; U1.1@473.45,244.25 473.45,203.84 ; U1.1@473.45,2010.55 473.45,1970.14 ; L1.2@1581.84,146.25 1632.53,196.93 1632.53,203.84 ; L1.2@1581.84,1912.55 1632.53,1963.23 1632.53,1970.14 ; L1.2@1582.55,153.86 1632.53,203.84 ; L1.2@1582.55,1920.17 1632.53,1970.14 ; U1.1@1632.53,244.25 1632.53,203.84 ; U1.1@1632.53,2010.55 1632.53,1970.14 ; L1.2@2740.92,146.25 2791.6,196.93 2791.6,203.84 ; L1.2@2740.92,1912.55 2791.6,1963.23 2791.6,1970.14 ; L1.2@2741.63,153.86 2791.6,203.84 ; L1.2@2741.63,1920.17 2791.6,1970.14 ; U1.1@2791.6,244.25 2791.6,203.84 ; U1.1@2791.6,2010.55 2791.6,1970.14 ; L1.2@3899.99,146.25 3950.68,196.93 3950.68,203.84 ; L1.2@3900.7,153.86 3950.68,203.84 ; U1.1@3950.68,244.25 3950.68,203.84 ; L1.2@5059.07,145.91 5109.75,196.6 5109.75,203.5 ; L1.2@5059.78,153.53 5109.75,203.5 ; U1.1@5109.75,243.92 5109.75,203.5 ; L1.2@6218.14,145.91 6268.83,196.6 6268.83,203.5 ; L1.2@6218.85,153.53 6268.83,203.5 ; U1.1@6268.83,243.92 6268.83,203.5 ; L1.2@7377.22,145.91 7427.9,196.6 7427.9,203.5 ; L1.2@7377.93,153.53 7427.9,203.5 ; U1.1@7427.9,243.92 7427.9,203.5 ; L1.2@8536.29,145.91 8586.98,196.6 8586.98,203.5 ; L1.2@8537,153.53 8586.98,203.5 ; U1.1@8586.98,243.92 8586.98,203.5
  Top Layer w8: C2.1@356.77,431.7 358.05,432.98 U1.35@436.48,432.98 ; C2.1@356.77,2198 358.05,2199.28 U1.35@436.48,2199.28 ; C2.1@1515.85,431.7 1517.12,432.98 U1.35@1595.56,432.98 ; C2.1@1515.85,2198 1517.12,2199.28 U1.35@1595.56,2199.28 ; C2.1@2674.92,431.7 2676.2,432.98 U1.35@2754.63,432.98 ; C2.1@2674.92,2198 2676.2,2199.28 U1.35@2754.63,2199.28 ; C2.1@3834,431.7 3835.27,432.98 U1.35@3913.71,432.98 ; C2.1@4993.07,431.37 4994.35,432.64 U1.35@5072.78,432.64 ; C2.1@6152.15,431.37 6153.43,432.64 U1.35@6231.86,432.64 ; C2.1@7311.22,431.37 7312.5,432.64 U1.35@7390.93,432.64 ; C2.1@8470.3,431.37 8471.58,432.64 U1.35@8550.01,432.64
  Top Layer w20: C2.1@358.45,427.57 358.45,351.95 358.45,261.68 288.49,191.72 288.49,168.85 280.18,160.54 C5.2@279.64,160.54 C4.2@349.65,160.54 356.33,153.86 415.15,153.86 422.77,146.25 L1.2@422.77,126.56 ; C2.1@358.45,2193.87 358.45,2118.26 358.45,2027.98 288.49,1958.03 288.49,1935.15 280.18,1926.85 C5.2@279.64,1926.85 C4.2@349.65,1926.85 356.33,1920.17 415.15,1920.17 422.77,1912.55 L1.2@422.77,1892.87 ; C2.1@1517.53,427.57 1517.53,351.95 1517.53,261.68 1447.57,191.72 1447.57,168.85 1439.26,160.54 C5.2@1438.72,160.54 C4.2@1508.73,160.54 1515.41,153.86 1574.23,153.86 1581.84,146.25 L1.2@1581.84,126.56 ; C2.1@1517.53,2193.87 1517.53,2118.26 1517.53,2027.98 1447.57,1958.03 1447.57,1935.15 1439.26,1926.85 C5.2@1438.72,1926.85 C4.2@1508.73,1926.85 1515.41,1920.17 1574.23,1920.17 1581.84,1912.55 L1.2@1581.84,1892.87 ; C2.1@2676.6,427.57 2676.6,351.95 2676.6,261.68 2606.64,191.72 2606.64,168.85 2598.33,160.54 C5.2@2597.79,160.54 C4.2@2667.8,160.54 2674.48,153.86 2733.3,153.86 2740.92,146.25 L1.2@2740.92,126.56 ; C2.1@2676.6,2193.87 2676.6,2118.26 2676.6,2027.98 2606.64,1958.03 2606.64,1935.15 2598.33,1926.85 C5.2@2597.79,1926.85 C4.2@2667.8,1926.85 2674.48,1920.17 2733.3,1920.17 2740.92,1912.55 L1.2@2740.92,1892.87 ; C2.1@3835.68,427.57 3835.68,351.95 3835.68,261.68 3765.72,191.72 3765.72,168.85 3757.41,160.54 C5.2@3756.87,160.54 C4.2@3826.88,160.54 3833.56,153.86 3892.38,153.86 3899.99,146.25 L1.2@3899.99,126.56 ; C2.1@4994.75,427.24 4994.75,351.62 4994.75,261.35 4924.79,191.39 4924.79,168.52 4916.49,160.21 C5.2@4915.94,160.21 C4.2@4985.95,160.21 4992.63,153.53 5051.45,153.53 5059.07,145.91 L1.2@5059.07,126.23 ; C2.1@6153.83,427.24 6153.83,351.62 6153.83,261.35 6083.87,191.39 6083.87,168.52 6075.56,160.21 C5.2@6075.02,160.21 C4.2@6145.03,160.21 6151.71,153.53 6210.53,153.53 6218.14,145.91 L1.2@6218.14,126.23 ; C2.1@7312.9,427.24 7312.9,351.62 7312.9,261.35 7242.94,191.39 7242.94,168.52 7234.64,160.21 C5.2@7234.1,160.21 C4.2@7304.1,160.21 7310.78,153.53 7369.6,153.53 7377.22,145.91 L1.2@7377.22,126.23 ; C2.1@8471.98,427.24 8471.98,351.62 8471.98,261.35 8402.02,191.39 8402.02,168.52 8393.71,160.21 C5.2@8393.17,160.21 C4.2@8463.18,160.21 8469.86,153.53 8528.68,153.53 8536.29,145.91 L1.2@8536.29,126.23
VINTA: C1.1 U1.33 | length 1045.2
  Top Layer w6: U1.33@487.23,442.57 487.23,471.43 504.47,488.68 504.47,516.47 C1.1@514.36,526.35 ; U1.33@487.23,2208.87 487.23,2237.74 504.47,2254.98 504.47,2282.77 C1.1@514.36,2292.66 ; U1.33@1646.31,442.57 1646.31,471.43 1663.55,488.68 1663.55,516.47 C1.1@1673.43,526.35 ; U1.33@1646.31,2208.87 1646.31,2237.74 1663.55,2254.98 1663.55,2282.77 C1.1@1673.43,2292.66 ; U1.33@2805.38,442.57 2805.38,471.43 2822.62,488.68 2822.62,516.47 C1.1@2832.51,526.35 ; U1.33@2805.38,2208.87 2805.38,2237.74 2822.62,2254.98 2822.62,2282.77 C1.1@2832.51,2292.66 ; U1.33@3964.46,442.57 3964.46,471.43 3981.7,488.68 3981.7,516.47 C1.1@3991.58,526.35 ; U1.33@5123.53,442.24 5123.53,471.1 5140.78,488.34 5140.78,516.14 C1.1@5150.66,526.02 ; U1.33@6282.61,442.24 6282.61,471.1 6299.85,488.34 6299.85,516.14 C1.1@6309.73,526.02 ; U1.33@7441.68,442.24 7441.68,471.1 7458.93,488.34 7458.93,516.14 C1.1@7468.81,526.02 ; U1.33@8600.76,442.24 8600.76,471.1 8618,488.34 8618,516.14 C1.1@8627.88,526.02
VSW: L1.1 U1.2 | length 2256.1
  Top Layer w7: U1.2@487.23,244.25 487.23,211.86 ; U1.2@487.23,2010.55 487.23,1978.16 ; L1.1@494.03,126.56 L1.1@490.63,129.96 ; L1.1@494.03,1892.87 L1.1@490.63,1896.26 ; U1.2@1646.31,244.25 1646.31,211.86 ; U1.2@1646.31,2010.55 1646.31,1978.16 ; L1.1@1653.1,126.56 L1.1@1649.7,129.96 ; L1.1@1653.1,1892.87 L1.1@1649.7,1896.26 ; U1.2@2805.38,244.25 2805.38,211.86 ; U1.2@2805.38,2010.55 2805.38,1978.16 ; L1.1@2812.18,126.56 L1.1@2808.78,129.96 ; L1.1@2812.18,1892.87 L1.1@2808.78,1896.26 ; U1.2@3964.46,244.25 3964.46,211.86 ; L1.1@3971.25,126.56 L1.1@3967.85,129.96 ; U1.2@5123.53,243.92 5123.53,211.52 ; L1.1@5130.33,126.23 L1.1@5126.93,129.63 ; U1.2@6282.61,243.92 6282.61,211.52 ; L1.1@6289.4,126.23 L1.1@6286.01,129.63 ; U1.2@7441.68,243.92 7441.68,211.52 ; L1.1@7448.48,126.23 L1.1@7445.08,129.63 ; U1.2@8600.76,243.92 8600.76,211.52 ; L1.1@8607.55,126.23 L1.1@8604.16,129.63 ; 487.23,211.86 487.23,133.36 L1.1@490.63,129.96 ; 487.23,211.86 492.19,206.89 492.19,131.52 L1.1@490.63,129.96 ; 487.23,1978.16 487.23,1899.66 L1.1@490.63,1896.26 ; 487.23,1978.16 492.19,1973.2 492.19,1897.83 L1.1@490.63,1896.26 ; 1646.31,211.86 1651.27,206.89 1651.27,131.52 L1.1@1649.7,129.96 ; 1646.31,211.86 1646.31,133.36 L1.1@1649.7,129.96 ; 1646.31,1978.16 1651.27,1973.2 1651.27,1897.83 L1.1@1649.7,1896.26 ; 1646.31,1978.16 1646.31,1899.66 L1.1@1649.7,1896.26 ; 2805.38,211.86 2805.38,133.36 L1.1@2808.78,129.96 ; 2805.38,211.86 2810.34,206.89 2810.34,131.52 L1.1@2808.78,129.96 ; 2805.38,1978.16 2805.38,1899.66 L1.1@2808.78,1896.26 ; 2805.38,1978.16 2810.34,1973.2 2810.34,1897.83 L1.1@2808.78,1896.26 ; 3964.46,211.86 3969.42,206.89 3969.42,131.52 L1.1@3967.85,129.96 ; 3964.46,211.86 3964.46,133.36 L1.1@3967.85,129.96 ; 5123.53,211.52 5123.53,133.03 L1.1@5126.93,129.63 ; 5123.53,211.52 5128.49,206.56 5128.49,131.19 L1.1@5126.93,129.63 ; 6282.61,211.52 6287.57,206.56 6287.57,131.19 L1.1@6286.01,129.63 ; 6282.61,211.52 6282.61,133.03 L1.1@6286.01,129.63 ; 7441.68,211.52 7441.68,133.03 L1.1@7445.08,129.63 ; 7441.68,211.52 7446.64,206.56 7446.64,131.19 L1.1@7445.08,129.63 ; 8600.76,211.52 8605.72,206.56 8605.72,131.19 L1.1@8604.16,129.63 ; 8600.76,211.52 8600.76,133.03 L1.1@8604.16,129.63
X32MI: U1.32 Y1.1 | length 2402.4
  Top Layer w6: U1.32@501.01,442.57 501.01,466.41 544.03,509.42 544.03,574.76 Y1.1@592.39,623.12 ; U1.32@501.01,2208.87 501.01,2232.71 544.03,2275.73 544.03,2341.06 Y1.1@592.39,2389.43 ; U1.32@1660.08,442.57 1660.08,466.41 1703.1,509.42 1703.1,574.76 Y1.1@1751.46,623.12 ; U1.32@1660.08,2208.87 1660.08,2232.71 1703.1,2275.73 1703.1,2341.06 Y1.1@1751.46,2389.43 ; U1.32@2819.16,442.57 2819.16,466.41 2862.18,509.42 2862.18,574.76 Y1.1@2910.54,623.12 ; U1.32@2819.16,2208.87 2819.16,2232.71 2862.18,2275.73 2862.18,2341.06 Y1.1@2910.54,2389.43 ; U1.32@3978.24,442.57 3978.24,466.41 4021.25,509.42 4021.25,574.76 Y1.1@4069.61,623.12 ; U1.32@5137.31,442.24 5137.31,466.08 5180.33,509.09 5180.33,574.43 Y1.1@5228.69,622.79 ; U1.32@6296.39,442.24 6296.39,466.08 6339.4,509.09 6339.4,574.43 Y1.1@6387.76,622.79 ; U1.32@7455.46,442.24 7455.46,466.08 7498.48,509.09 7498.48,574.43 Y1.1@7546.84,622.79 ; U1.32@8614.54,442.24 8614.54,466.08 8657.55,509.09 8657.55,574.43 Y1.1@8705.91,622.79
X32MO: U1.31 Y1.3 | length 2118.4
  Top Layer w6: U1.31@514.79,442.57 515,442.78 515,461.55 547.49,494.04 630.18,494.04 Y1.3@661.91,525.77 ; U1.31@514.79,2208.87 515,2209.08 515,2227.86 547.49,2260.35 630.18,2260.35 Y1.3@661.91,2292.08 ; U1.31@1673.86,442.57 1674.07,442.78 1674.07,461.55 1706.56,494.04 1789.26,494.04 Y1.3@1820.99,525.77 ; U1.31@1673.86,2208.87 1674.07,2209.08 1674.07,2227.86 1706.56,2260.35 1789.26,2260.35 Y1.3@1820.99,2292.08 ; U1.31@2832.94,442.57 2833.15,442.78 2833.15,461.55 2865.64,494.04 2948.33,494.04 Y1.3@2980.06,525.77 ; U1.31@2832.94,2208.87 2833.15,2209.08 2833.15,2227.86 2865.64,2260.35 2948.33,2260.35 Y1.3@2980.06,2292.08 ; U1.31@3992.01,442.57 3992.22,442.78 3992.22,461.55 4024.71,494.04 4107.41,494.04 Y1.3@4139.14,525.77 ; U1.31@5151.09,442.24 5151.3,442.45 5151.3,461.22 5183.79,493.71 5266.48,493.71 Y1.3@5298.21,525.44 ; U1.31@6310.16,442.24 6310.37,442.45 6310.37,461.22 6342.86,493.71 6425.56,493.71 Y1.3@6457.29,525.44 ; U1.31@7469.24,442.24 7469.45,442.45 7469.45,461.22 7501.94,493.71 7584.63,493.71 Y1.3@7616.36,525.44 ; U1.31@8628.32,442.24 8628.52,442.45 8628.52,461.22 8661.01,493.71 8743.71,493.71 Y1.3@8775.44,525.44

## Polygon pours and split planes (outlines as drawn)
GND on Bottom Layer "GND" (hatched 90Degree grid 8 track 8, remove dead copper, pour order 21): 2318.15,2743.87 2318.15,1766.64 3083.52,1766.64 3083.52,2743.87
GND on Bottom Layer "GND" (hatched 90Degree grid 8 track 8, remove dead copper, pour order 19): 1159.08,2743.87 1159.08,1766.64 1924.45,1766.64 1924.45,2743.87
GND on Bottom Layer "GND" (hatched 90Degree grid 8 track 8, remove dead copper, pour order 17): 0,2743.87 0,1766.64 765.37,1766.64 765.37,2743.87
GND on Bottom Layer "GND" (hatched 90Degree grid 8 track 8, remove dead copper, pour order 15): 8113.53,977.23 8113.53,0 8878.9,0 8878.9,977.23
GND on Bottom Layer "GND" (hatched 90Degree grid 8 track 8, remove dead copper, pour order 13): 6954.45,977.23 6954.45,0 7719.83,0 7719.83,977.23
GND on Bottom Layer "GND" (hatched 90Degree grid 8 track 8, remove dead copper, pour order 11): 5795.38,977.23 5795.38,0 6560.75,0 6560.75,977.23
GND on Bottom Layer "GND" (hatched 90Degree grid 8 track 8, remove dead copper, pour order 9): 4636.3,977.23 4636.3,0 5401.68,0 5401.68,977.23
GND on Bottom Layer "GND" (hatched 90Degree grid 8 track 8, remove dead copper, pour order 7): 3477.23,977.56 3477.23,0.33 4242.6,0.33 4242.6,977.56
GND on Bottom Layer "GND" (hatched 90Degree grid 8 track 8, remove dead copper, pour order 5): 2318.15,977.56 2318.15,0.33 3083.52,0.33 3083.52,977.56
GND on Bottom Layer "GND" (hatched 90Degree grid 8 track 8, remove dead copper, pour order 3): 1159.08,977.56 1159.08,0.33 1924.45,0.33 1924.45,977.56
GND on Bottom Layer "GND" (hatched 90Degree grid 8 track 8, remove dead copper, pour order 1): 0,977.56 0,0.33 765.37,0.33 765.37,977.56
GND on Top Layer "GND" (hatched 90Degree grid 8 track 8, remove dead copper, pour order 20): 2318.15,2743.87 3083.52,2743.87 3083.52,1766.3 2318.15,1766.3
GND on Top Layer "GND" (hatched 90Degree grid 8 track 8, remove dead copper, pour order 18): 1159.08,2743.87 1924.45,2743.87 1924.45,1766.3 1159.08,1766.3
GND on Top Layer "GND" (hatched 90Degree grid 8 track 8, remove dead copper, pour order 16): 0,2743.87 765.37,2743.87 765.37,1766.3 0,1766.3
GND on Top Layer "GND" (hatched 90Degree grid 8 track 8, remove dead copper, pour order 14): 8113.53,977.23 8878.9,977.23 8878.9,-0.33 8113.53,-0.33
GND on Top Layer "GND" (hatched 90Degree grid 8 track 8, remove dead copper, pour order 12): 6954.45,977.23 7719.83,977.23 7719.83,-0.33 6954.45,-0.33
GND on Top Layer "GND" (hatched 90Degree grid 8 track 8, remove dead copper, pour order 10): 5795.38,977.23 6560.75,977.23 6560.75,-0.33 5795.38,-0.33
GND on Top Layer "GND" (hatched 90Degree grid 8 track 8, remove dead copper, pour order 8): 4636.3,977.23 5401.68,977.23 5401.68,-0.33 4636.3,-0.33
GND on Top Layer "GND" (hatched 90Degree grid 8 track 8, remove dead copper, pour order 6): 3477.23,977.56 4242.6,977.56 4242.6,0 3477.23,0
GND on Top Layer "GND" (hatched 90Degree grid 8 track 8, remove dead copper, pour order 4): 2318.15,977.56 3083.52,977.56 3083.52,0 2318.15,0
GND on Top Layer "GND" (hatched 90Degree grid 8 track 8, remove dead copper, pour order 2): 1159.08,977.56 1924.45,977.56 1924.45,0 1159.08,0
GND on Top Layer "GND" (hatched 90Degree grid 8 track 8, remove dead copper, pour order 0): 0,977.56 765.37,977.56 765.37,0 0,0

## Keep-outs
Keep-Out Layer:
  lines w15: 0,0 0,977.56 765.37,977.56 765.37,0 0,0 ; 0,1766.3 0,2743.87 765.37,2743.87 765.37,1766.3 0,1766.3 ; 1159.08,0 1924.45,0 1924.45,977.56 1159.08,977.56 1159.08,0 ; 1159.08,1766.3 1924.45,1766.3 1924.45,2743.87 1159.08,2743.87 1159.08,1766.3 ; 2318.15,0 2318.15,977.56 3083.52,977.56 3083.52,0 2318.15,0 ; 2318.15,1766.3 2318.15,2743.87 3083.52,2743.87 3083.52,1766.3 2318.15,1766.3 ; 3477.23,0 4242.6,0 4242.6,977.56 3477.23,977.56 3477.23,0 ; 4636.3,-0.33 4636.3,977.23 5401.68,977.23 5401.68,-0.33 4636.3,-0.33 ; 5795.38,-0.33 6560.75,-0.33 6560.75,977.23 5795.38,977.23 5795.38,-0.33 ; 6954.45,-0.33 6954.45,977.23 7719.83,977.23 7719.83,-0.33 6954.45,-0.33 ; 8113.53,-0.33 8878.9,-0.33 8878.9,977.23 8113.53,977.23 8113.53,-0.33

## Other copper
Top Layer:
  rectangle net GND: 2779.14,2472.1 2854.45,2498.91
  rectangle net GND: 2792.94,2467.5 2828.38,2510.72
  rectangle net GND: 1633.87,2467.5 1669.3,2510.72
  rectangle net GND: 1620.07,2472.1 1695.38,2498.91
  rectangle net GND: 460.99,2472.1 536.3,2498.91
  rectangle net GND: 474.79,2467.5 510.23,2510.72
  rectangle net GND: 8588.32,700.87 8623.75,744.08
  rectangle net GND: 8574.52,705.46 8649.83,732.27
  rectangle net GND: 7415.44,705.46 7490.75,732.27
  rectangle net GND: 7402.91,728.27 7414.72,738.18
  rectangle net GND: 7402.91,728.27 7428.72,732.27
  rectangle net GND: 7408.81,718.27 7428.72,728.87
  rectangle net GND: 6249.74,718.27 6269.64,728.87
  rectangle net GND: 6243.83,728.27 6269.64,732.27
  rectangle net GND: 6243.83,728.27 6255.64,738.18
  rectangle net GND: 6256.37,705.46 6331.68,732.27
  rectangle net GND: 5097.29,705.46 5172.6,732.27
  rectangle net GND: 5111.29,702.06 5146.73,744.08
  rectangle net GND: 3952.22,702.39 3987.65,744.41
  rectangle net GND: 3938.22,705.79 4013.53,732.6
  rectangle net GND: 2767.36,729.87 2779.17,736.81
  rectangle net GND: 2767.36,728.6 2800.53,732.6
  rectangle net GND: 1608.28,728.6 1641.45,732.6
  rectangle net GND: 1608.28,729.87 1620.1,736.81
  rectangle net GND: 476.01,701.61 511.44,744.57
  rectangle net GND: 466.01,710.04 531.53,732.6
  pour cut-out: 8517,166.88 8517,76.24 8626.99,76.24 8626.99,167.16 8626.15,167.16
  pour cut-out: 7357.92,166.88 7357.92,76.24 7467.91,76.24 7467.91,167.16 7467.08,167.16
  pour cut-out: 6198.85,166.88 6198.85,76.24 6308.84,76.24 6308.84,167.16 6308,167.16
  pour cut-out: 5039.77,166.88 5039.77,76.24 5149.76,76.24 5149.76,167.16 5148.93,167.16
  pour cut-out: 3880.7,167.21 3880.7,76.57 3990.69,76.57 3990.69,167.49 3989.85,167.49
  pour cut-out: 2721.62,167.21 2721.62,76.57 2831.61,76.57 2831.61,167.49 2830.78,167.49
  pour cut-out: 2721.62,1933.51 2721.62,1842.87 2831.61,1842.87 2831.61,1933.79 2830.78,1933.79
  pour cut-out: 1562.55,1933.51 1562.55,1842.87 1672.54,1842.87 1672.54,1933.79 1671.7,1933.79
  pour cut-out: 403.47,1933.51 403.47,1842.87 513.46,1842.87 513.46,1933.79 512.62,1933.79
  pour cut-out: 1562.55,167.21 1562.55,76.57 1672.54,76.57 1672.54,167.49 1671.7,167.49
  pour cut-out: 403.47,167.21 403.47,76.57 513.46,76.57 513.46,167.49 512.62,167.49
Multi-Layer:
  pour cut-out: 2318.15,2745.21 2318.15,2494.91 3083.52,2494.91 3083.52,2745.21
  pour cut-out: 1159.08,2745.21 1159.08,2494.91 1924.45,2494.91 1924.45,2745.21
  pour cut-out: 0,2745.21 0,2494.91 765.37,2494.91 765.37,2745.21
  pour cut-out: 8113.53,978.57 8113.53,728.27 8878.9,728.27 8878.9,978.57
  pour cut-out: 6954.45,978.57 6954.45,728.27 7719.83,728.27 7719.83,978.57
  pour cut-out: 5795.38,978.57 5795.38,728.27 6560.75,728.27 6560.75,978.57
  pour cut-out: 4636.3,978.57 4636.3,728.27 5401.68,728.27 5401.68,978.57
  pour cut-out: 3477.23,978.9 3477.23,728.6 4242.6,728.6 4242.6,978.9
  pour cut-out: 2318.15,978.9 2318.15,728.6 3083.52,728.6 3083.52,978.9
  pour cut-out: 1159.08,978.9 1159.08,728.6 1924.45,728.6 1924.45,978.9
  pour cut-out: 0,978.9 0,728.6 765.37,728.6 765.37,978.9

## Silkscreen, mask and mechanical layers (free items; w line width, h text height)
Top Overlay:
  text "2.4mm FR4" at 176.4,2763.1 h40
  text "2.0mm FR4" at 1335.47,2763.1 h40
  text "0.4mm FR4" at 2494.55,2763.1 h40
  text "建议天线开窗" at 4087.82,2650.78 h100
  text "1.6mm FR4" at 190.94,1015.44 h40
  text "1.6mm FR4" at 1335.47,996.8 h40
  text "1.2mm FR4" at 2494.55,996.8 h40
  text "1.2mm FR4" at 3653.62,996.8 h40
  text "1.0mm FR4" at 4812.7,996.47 h40
  text "0.8mm FR4" at 5971.77,996.47 h40
  text "0.8mm FR4" at 7130.85,996.47 h40
  text "0.6mm FR4" at 8289.92,996.47 h40
Mechanical 1:
  lines w15: 0,0 0,977.56 765.37,977.56 765.37,0 0,0 ; 0,1766.3 0,2743.87 765.37,2743.87 765.37,1766.3 0,1766.3 ; 1159.08,0 1924.45,0 1924.45,977.56 1159.08,977.56 1159.08,0 ; 1159.08,1766.3 1924.45,1766.3 1924.45,2743.87 1159.08,2743.87 1159.08,1766.3 ; 2318.15,0 2318.15,977.56 3083.52,977.56 3083.52,0 2318.15,0 ; 2318.15,1766.3 2318.15,2743.87 3083.52,2743.87 3083.52,1766.3 2318.15,1766.3 ; 3477.23,0 4242.6,0 4242.6,977.56 3477.23,977.56 3477.23,0 ; 4636.3,-0.33 4636.3,977.23 5401.68,977.23 5401.68,-0.33 4636.3,-0.33 ; 5795.38,-0.33 6560.75,-0.33 6560.75,977.23 5795.38,977.23 5795.38,-0.33 ; 6954.45,-0.33 6954.45,977.23 7719.83,977.23 7719.83,-0.33 6954.45,-0.33 ; 8113.53,-0.33 8878.9,-0.33 8878.9,977.23 8113.53,977.23 8113.53,-0.33